# Altium PCB PCB1.PcbDoc (part 3 of 7)
Units mil, origin at the board's own origin, x right, y up, seen from the top; angles counter-clockwise.
Board outline 7650 x 4400 mil, 2 copper layers (Top Layer, Bottom Layer); 123 components, 190 nets, 788 pads, 165 vias.
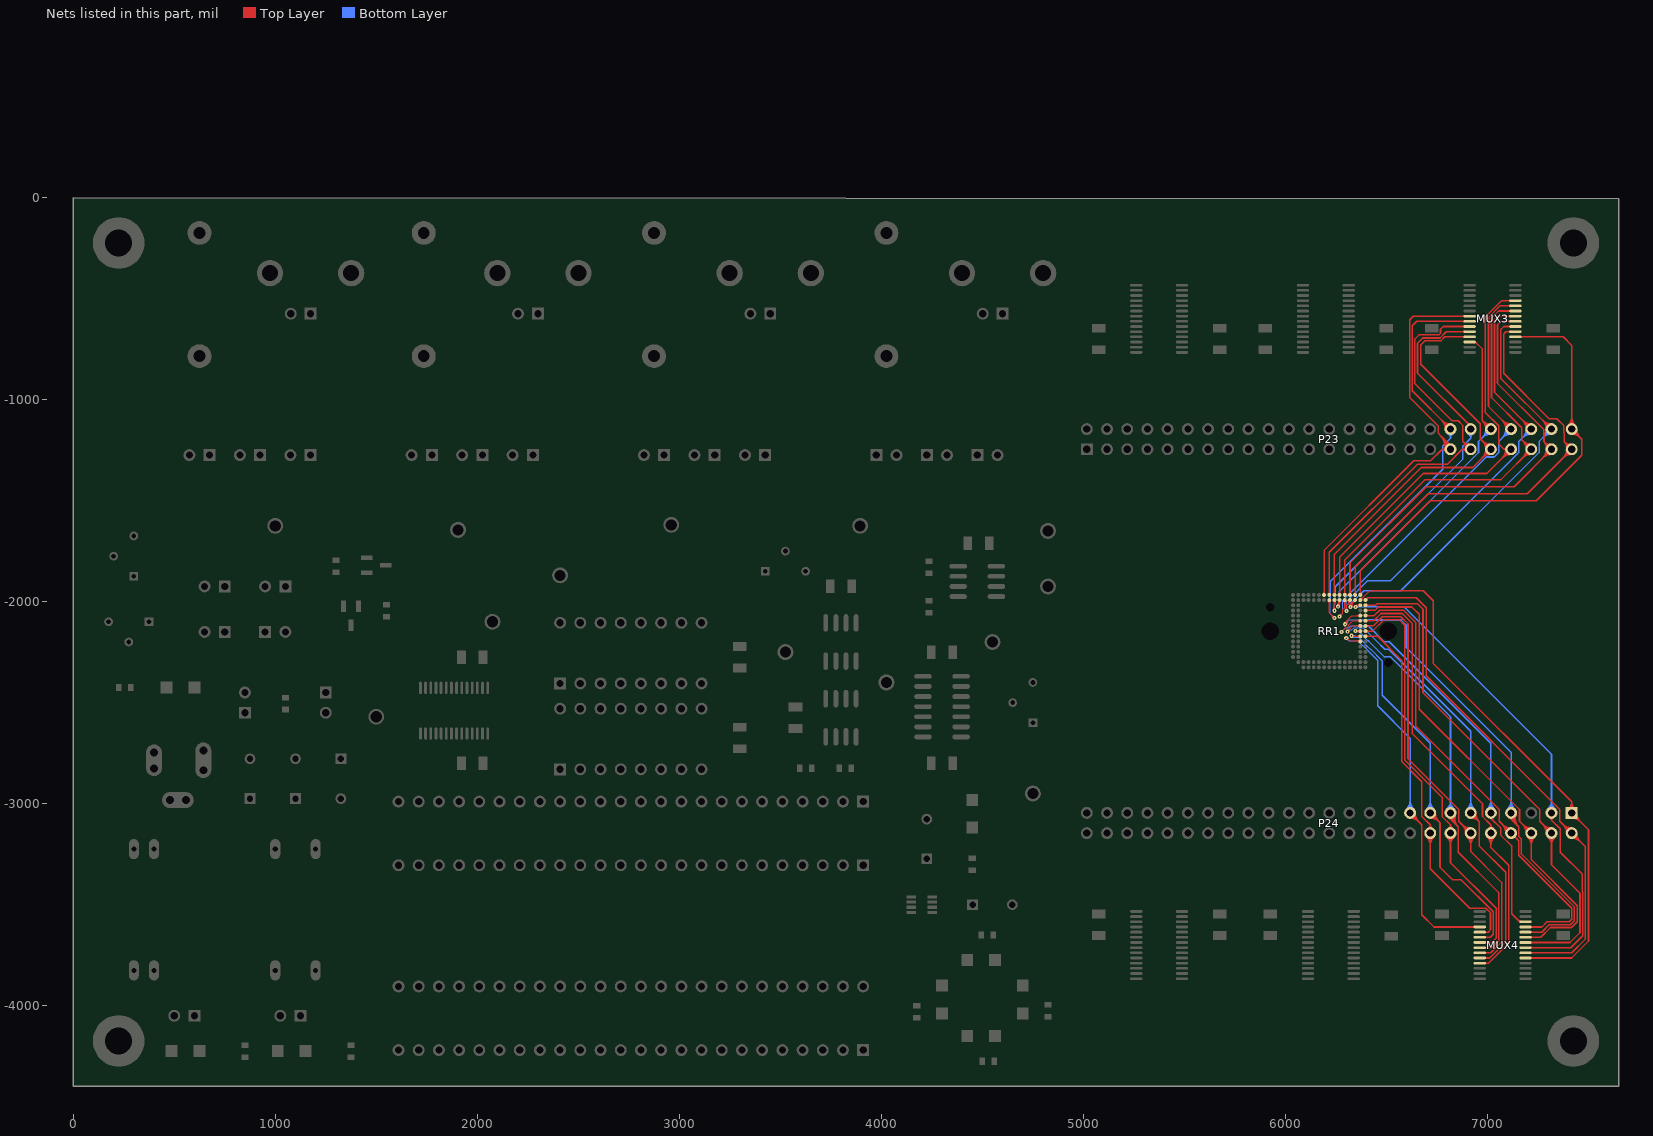
[diagram p3: the nets of this part, all layers, seen from the top]

## Via types
v1: diameter 30, hole 10, Top Layer to Bottom Layer, 118 vias
v2: diameter 20, hole 6, Top Layer to Bottom Layer, 47 vias

## Nets (pads, with @x,y where several pads share a name; then routed paths per layer and width w, separated by ;. In a path a pad name is that pad's centre, name@x,y a point inside that pad or via, vN(x,y) a via of type N, cw(c..) or ccw(c..) an arc to the next point about the centre after c; other vN are vias at no path point) (continued)
CELL34: MUX3.21 P23.37 RR1.37 | length 2430.9
  Top Layer w8: RR1.37@6187.28,-1962.73 ccw(c6177.3,-1952.76) 6191.41,-1952.76 ccw(c6205.51,-1952.76) RR1.37@6195.54,-1962.73 ; RR1.37@6191.41,-1966.87 6191.41,-1746.59 6634.47,-1303.53 6718.2,-1303.53 6775.73,-1246 ; 6759.99,-1169.99 cw(c6683.97,-1246) P23.37@6791.47,-1246 ; 6773.64,-1183.64 cw(c6711.29,-1246) P23.37@6799.47,-1246 ; 6787.3,-1197.3 cw(c6738.6,-1246) P23.37@6807.47,-1246 ; P23.37@6794.16,-1257.4 ccw(c6775.73,-1266.6) 6775.73,-1246 ; P23.37@6794.16,-1234.6 cw(c6775.73,-1225.4) 6775.73,-1246 ; 6800.96,-1210.96 cw(c6765.91,-1246) P23.37@6815.47,-1246 ; 6805.86,-1215.86 ccw(c6817,-1204.71) P23.37@6817,-1220.47 ; MUX3.21@6911.81,-587.2 6632.8,-587.2 6615,-605 6615,-989.51 6755.53,-1130.04 6755.53,-1165.53 6817,-1227 P23.37@6817,-1246 6775.73,-1246 ; 6881.21,-587.2 ccw(c6881.21,-580.23) 6886.15,-585.16 cw(c6881.21,-580.23) 6881.21,-587.2 ; 6881.21,-587.2 cw(c6881.21,-594.18) 6886.15,-589.25 ccw(c6881.21,-594.18) 6881.21,-587.2
CELL35: MUX3.22 P23.38 RR1.38 | length 2646
  Top Layer w5: RR1.38@6217,-1992.46 6217,-2056 v2(6242,-2081) ; 6233.02,-2075.46 ccw(c6243.72,-2072.59) v2@6241.5,-2083.45 ; 6236.46,-2072.02 cw(c6233.59,-2082.72) v2@6244.45,-2080.5 ; 6217,-2010.18 ccw(c6199.27,-2010.18) 6211.81,-1997.65 cw(c6199.27,-2010.18) 6217,-2010.18 ; 6217,-2010.18 cw(c6234.73,-2010.18) 6222.19,-1997.65 ccw(c6234.73,-2010.18) 6217,-2010.18 ; 6229.2,-2068.2 ccw(c6242,-2055.39) 6242,-2073.5 cw(c6242,-2055.39) 6229.2,-2068.2 ; 6229.2,-2068.2 cw(c6216.39,-2081) 6234.5,-2081 ccw(c6216.39,-2081) 6229.2,-2068.2
  Top Layer w8: P23.38@6791.47,-1146 ccw(c6729.84,-1146) 6773.42,-1102.42 ccw(c6817,-1058.84) P23.38@6817,-1120.47 ; P23.38@6799.47,-1146 ccw(c6757.16,-1146) 6787.08,-1116.08 ccw(c6817,-1086.16) P23.38@6817,-1128.47 ; P23.38@6817,-1146 6628,-957 6628,-635 6650.2,-612.8 MUX3.22@6911.81,-612.8 ; 6881.21,-612.8 ccw(c6881.21,-605.82) 6886.15,-610.75 cw(c6881.21,-605.82) 6881.21,-612.8 ; 6881.21,-612.8 cw(c6881.21,-619.77) 6886.15,-614.84 ccw(c6881.21,-619.77) 6881.21,-612.8
  Bottom Layer w5: 6222,-1996 6222,-2061 v2(6242,-2081) ; 6229.2,-2068.2 ccw(c6242,-2055.39) 6242,-2073.5 cw(c6242,-2055.39) 6229.2,-2068.2 ; 6229.2,-2068.2 cw(c6216.39,-2081) 6234.5,-2081 ccw(c6216.39,-2081) 6229.2,-2068.2
  Bottom Layer w8: 6222,-1996 6222,-1901 6778.47,-1344.53 6778.47,-1230.04 6817,-1191.51 ; P23.38@6803.69,-1167.78 cw(c6789.19,-1191.51) 6817,-1191.51 ; P23.38@6807.86,-1160.96 cw(c6797.91,-1177.25) 6817,-1177.25 cw(c6836.09,-1177.25) P23.38@6826.14,-1160.96 ; P23.38@6817,-1146 6817,-1191.51 ; P23.38@6830.31,-1167.78 ccw(c6844.81,-1191.51) 6817,-1191.51
CELL36: MUX3.23 P23.39 RR1.39 | length 2331.7
  Top Layer w8: RR1.39@6212.87,-1962.73 ccw(c6202.9,-1952.76) 6217,-1952.76 ccw(c6231.1,-1952.76) RR1.39@6221.13,-1962.73 ; RR1.39@6217,-1966.87 6217,-1756 6653.47,-1319.53 6802.2,-1319.53 6875.73,-1246 ; P23.39@6891.58,-1243.68 ccw(c6846.39,-1239.56) 6878.47,-1207.47 ; P23.39@6894.16,-1257.4 ccw(c6875.73,-1266.6) 6875.73,-1246 ; P23.39@6894.16,-1234.6 cw(c6875.73,-1225.4) 6875.73,-1246 ; P23.39@6899.54,-1244.41 ccw(c6868.52,-1241.58) 6890.55,-1219.55 ccw(c6912.58,-1197.52) P23.39@6915.41,-1228.54 ; MUX3.23@6911.81,-638.39 6781.61,-638.39 6767.46,-652.54 6767.46,-672.23 6759.7,-680 6661,-680 6641,-700 6641,-921 6825,-1105 6855,-1105 6878.47,-1128.47 6878.47,-1207.47 ; P23.39@6914.68,-1220.58 cw(c6910.56,-1175.39) 6878.47,-1207.47 ; 6875.73,-1246 P23.39@6917,-1246 6878.47,-1207.47 ; 6881.21,-638.39 ccw(c6881.21,-631.41) 6886.15,-636.34 cw(c6881.21,-631.41) 6881.21,-638.39 ; 6881.21,-638.39 cw(c6881.21,-645.36) 6886.15,-640.43 ccw(c6881.21,-645.36) 6881.21,-638.39
CELL37: MUX3.24 P23.40 RR1.40 | length 2334.2
  Top Layer w5: v2(6242.5,-2045.32) 6242.5,-1992.55 RR1.40@6242.59,-1992.46 ; 6242.5,-2027.21 ccw(c6260.61,-2027.21) 6247.8,-2040.02 cw(c6260.61,-2027.21) 6242.5,-2027.21 ; 6242.5,-2027.21 cw(c6224.39,-2027.21) 6237.2,-2040.02 ccw(c6224.39,-2027.21) 6242.5,-2027.21 ; RR1.40@6237.4,-1997.65 cw(c6225.08,-2009.96) 6242.5,-2009.96 ccw(c6225.08,-2009.96) RR1.40@6237.4,-1997.65 ; 6242.5,-2010.4 cw(c6260.54,-2010.4) 6247.78,-1997.65 ccw(c6260.54,-2010.4) 6242.5,-2010.4
  Top Layer w8: MUX3.24@6911.81,-663.98 6796.02,-663.98 6765,-695 6680,-695 6654,-721 6654,-869 6917,-1132 P23.40@6917,-1146 ; 6881.21,-663.98 ccw(c6881.21,-657) 6886.15,-661.93 cw(c6881.21,-657) 6881.21,-663.98 ; 6881.21,-663.98 cw(c6881.21,-670.95) 6886.15,-666.02 ccw(c6881.21,-670.95) 6881.21,-663.98
  Bottom Layer w5: v2(6242.5,-2045.32) 6242.5,-2017.75 6247,-2013.25 6247,-1960 ; 6242.5,-2027.21 ccw(c6260.61,-2027.21) 6247.8,-2040.02 cw(c6260.61,-2027.21) 6242.5,-2027.21 ; 6242.5,-2027.21 cw(c6224.39,-2027.21) 6237.2,-2040.02 ccw(c6224.39,-2027.21) 6242.5,-2027.21
  Bottom Layer w8: 6247,-1960 6247,-1926 6878.47,-1294.53 6878.47,-1230.04 6917,-1191.51 ; P23.40@6903.69,-1167.78 cw(c6889.19,-1191.51) 6917,-1191.51 ; P23.40@6907.86,-1160.96 cw(c6897.91,-1177.25) 6917,-1177.25 cw(c6936.09,-1177.25) P23.40@6926.14,-1160.96 ; P23.40@6917,-1146 6917,-1191.51 ; P23.40@6930.31,-1167.78 ccw(c6944.81,-1191.51) 6917,-1191.51
CELL38: MUX3.25 P23.41 RR1.41 | length 2479.9
  Top Layer w8: RR1.41@6238.46,-1962.73 ccw(c6228.49,-1952.76) 6242.59,-1952.76 ccw(c6256.7,-1952.76) RR1.41@6246.72,-1962.73 ; RR1.41@6242.59,-1966.87 6242.59,-1765.41 6672,-1336 6927,-1336 P23.41@7017,-1246 6965,-1194 6965,-1120 6670,-825 6670,-730 6692,-708 6770.38,-708 6788.82,-689.57 MUX3.25@6911.81,-689.57 ; P23.41@7017,-1271.53 ccw(c7017,-1333.16) 6973.42,-1289.58 ccw(c6929.84,-1246) 6991.47,-1246 ccw(c6929.84,-1246) 6973.42,-1202.42 ccw(c7017,-1158.84) P23.41@7017,-1220.47 ; P23.41@7017,-1263.53 ccw(c7017,-1305.84) 6987.08,-1275.92 ccw(c6957.16,-1246) 6999.47,-1246 ccw(c6957.16,-1246) 6987.08,-1216.08 ccw(c7017,-1186.16) P23.41@7017,-1228.47 ; 6881.21,-689.57 ccw(c6881.21,-682.59) 6886.15,-687.52 cw(c6881.21,-682.59) 6881.21,-689.57 ; 6881.21,-689.57 cw(c6881.21,-696.54) 6886.15,-691.61 ccw(c6881.21,-696.54) 6881.21,-689.57
CELL39: MUX3.26 P23.42 RR1.42 | length 2556.9
  Top Layer w5: v2@6258.89,-2017.58 ccw(c6257.42,-2007.83) 6265.35,-2013.69 ; v2(6260,-2025) 6268.18,-2016.82 ; 6260.99,-2011.46 ccw(c6268.34,-2016.89) v2@6261.79,-2023.26 ; RR1.42@6261.83,-1996.15 cw(c6246.66,-2004.97) 6263.61,-2009.51 cw(c6280.57,-2014.05) RR1.42@6271.83,-1998.83 ; 6264.49,-2006.73 ccw(c6272.62,-2012.73) v2@6265.38,-2019.77 ; 6265.95,-2012.88 ccw(c6271.06,-2016.66) v2@6265.99,-2020.48 ; 6268.18,-2016.82 ccw(c6271.84,-2020.48) 6267.01,-2022.32 cw(c6271.84,-2020.48) 6268.18,-2016.82 ; 6268.18,-2016.82 cw(c6264.52,-2013.16) 6262.68,-2017.99 ccw(c6264.52,-2013.16) 6268.18,-2016.82 ; 6268.18,-2016.82 RR1.42@6268.18,-1992.46 ; 6268.18,-2010.18 ccw(c6250.45,-2010.18) 6262.99,-1997.65 cw(c6250.45,-2010.18) 6268.18,-2010.18 ; 6268.18,-2010.18 cw(c6285.91,-2010.18) 6273.37,-1997.65 ccw(c6285.91,-2010.18) 6268.18,-2010.18 ; RR1.42@6268.18,-1992.46 cw(c6234.08,-1992.46) 6255.33,-2019.13 ccw(c6234.08,-1992.46) RR1.42@6268.18,-1992.46 ; v2@6258.44,-2023.04 ccw(c6242.34,-2002.83) 6268.18,-2002.83 cw(c6242.34,-2002.83) v2@6258.44,-2023.04 ; v2@6261.56,-2026.96 ccw(c6250.61,-2013.21) 6268.18,-2013.21 cw(c6250.61,-2013.21) v2@6261.56,-2026.96
  Top Layer w8: MUX3.26@6911.81,-715.16 6940.16,-715.16 6975,-750 6975,-1104 ; MUX3.26@6937.94,-713.71 ccw(c6952.23,-705.46) 6947.96,-721.4 ; P23.42@6991.48,-1145.32 ccw(c6935.17,-1143.83) 6975,-1104 ; P23.42@6999.48,-1145.54 ccw(c6960.81,-1144.51) 6988.16,-1117.16 ccw(c7015.51,-1089.81) P23.42@7016.54,-1128.48 ; P23.42@7016.32,-1120.48 cw(c7014.83,-1064.17) 6975,-1104 ; P23.42@7017,-1146 6975,-1104 ; MUX3.26@6935.43,-718.05 cw(c6935.43,-736.43) 6948.43,-723.43 ccw(c6935.43,-736.43) MUX3.26@6935.43,-718.05
  Bottom Layer w5: v2@6258.06,-2017.76 ccw(c6255.51,-2008.23) 6264.05,-2013.16 ; v2(6260,-2025) 6267,-2018 6267,-1977 ; 6260.1,-2010.47 ccw(c6269.16,-2015.78) v2@6261.76,-2023.23 ; 6263.37,-2004.91 ccw(c6273.85,-2011.06) v2@6265.29,-2019.68 ; 6265.28,-2011.02 ccw(c6272.58,-2015.23) v2@6265.92,-2020.4 ; v2@6254.7,-2019.7 ccw(c6224.99,-1989.99) 6267,-1989.99 cw(c6224.99,-1989.99) v2@6254.7,-2019.7 ; v2@6258.23,-2023.23 ccw(c6237.07,-2002.07) 6267,-2002.07 cw(c6237.07,-2002.07) v2@6258.23,-2023.23 ; v2@6261.77,-2026.77 ccw(c6249.14,-2014.14) 6267,-2014.14 cw(c6249.14,-2014.14) v2@6261.77,-2026.77
  Bottom Layer w8: 6267,-1977 6267,-1950.49 6955.53,-1261.96 6955.53,-1207.47 P23.42@7017,-1146 ; P23.42@6991.47,-1146 cw(c6929.84,-1146) 6973.42,-1189.58 cw(c7017,-1233.16) P23.42@7017,-1171.53 ; P23.42@6999.47,-1146 cw(c6957.16,-1146) 6987.08,-1175.92 cw(c7017,-1205.84) P23.42@7017,-1163.53
CELL40: MUX3.11 P23.43 RR1.43 | length 2402.7
  Top Layer w8: RR1.43@6264.05,-1962.73 ccw(c6254.08,-1952.76) 6268.18,-1952.76 ccw(c6282.29,-1952.76) RR1.43@6272.31,-1962.73 ; RR1.43@6268.18,-1966.87 6268.18,-1779.82 6682,-1366 6997,-1366 P23.43@7117,-1246 7082.06,-1246 ; P23.43@7091.47,-1246 cw(c7029.84,-1246) 7073.42,-1289.58 cw(c7117,-1333.16) P23.43@7117,-1271.53 ; P23.43@7092.68,-1253.76 ccw(c7082.06,-1257.15) 7082.06,-1246 ; P23.43@7092.68,-1238.24 cw(c7082.06,-1234.85) 7082.06,-1246 ; P23.43@7099.47,-1246 cw(c7057.16,-1246) 7087.08,-1275.92 cw(c7117,-1305.84) P23.43@7117,-1263.53 ; MUX3.11@7138.19,-510.43 7069.57,-510.43 6990,-590 6990,-1064.51 7055.53,-1130.04 7055.53,-1219.47 7082.06,-1246 ; 7107.59,-510.43 ccw(c7107.59,-503.46) 7112.52,-508.39 cw(c7107.59,-503.46) 7107.59,-510.43 ; 7107.59,-510.43 cw(c7107.59,-517.41) 7112.52,-512.48 ccw(c7107.59,-517.41) 7107.59,-510.43
CELL41: MUX3.10 P23.44 RR1.44 | length 2665
  Top Layer w5: v2@6265.55,-2073.5 cw(c6276.41,-2075.72) 6273.54,-2065.02 ; v2(6268,-2074) 6284.5,-2057.5 6284.5,-2038.75 6293.77,-2029.48 RR1.44@6293.77,-1992.46 ; v2@6268.5,-2076.45 ccw(c6266.28,-2065.59) 6276.98,-2068.46 ; 6280.8,-2061.2 ccw(c6293.61,-2074) 6275.5,-2074 cw(c6293.61,-2074) 6280.8,-2061.2 ; 6280.8,-2061.2 cw(c6268,-2048.39) 6268,-2066.5 ccw(c6268,-2048.39) 6280.8,-2061.2 ; 6293.77,-2010.18 ccw(c6276.05,-2010.18) 6288.58,-1997.65 cw(c6276.05,-2010.18) 6293.77,-2010.18 ; 6293.77,-2010.18 cw(c6311.5,-2010.18) 6298.96,-1997.65 ccw(c6311.5,-2010.18) 6293.77,-2010.18
  Top Layer w8: P23.44@7091.47,-1146 ccw(c7029.84,-1146) 7073.42,-1102.42 ccw(c7117,-1058.84) P23.44@7117,-1120.47 ; P23.44@7099.47,-1146 ccw(c7057.16,-1146) 7087.08,-1116.08 ccw(c7117,-1086.16) P23.44@7117,-1128.47 ; P23.44@7117,-1146 7005,-1034 7005,-593.38 7062.36,-536.02 MUX3.10@7138.19,-536.02 ; 7107.59,-536.02 ccw(c7107.59,-529.05) 7112.52,-533.98 cw(c7107.59,-529.05) 7107.59,-536.02 ; 7107.59,-536.02 cw(c7107.59,-543) 7112.52,-538.07 ccw(c7107.59,-543) 7107.59,-536.02
  Bottom Layer w5: v2(6268,-2074) 6284,-2058 6284,-1994 6327,-1951 ; v2@6268,-2066.5 ccw(c6268,-2048.39) 6280.8,-2061.2 ccw(c6293.61,-2074) v2@6275.5,-2074
  Bottom Layer w8: 6327,-1951 6993.47,-1284.53 7032.96,-1284.53 7055.53,-1261.96 7055.53,-1207.47 P23.44@7117,-1146 ; P23.44@7091.47,-1146 cw(c7029.84,-1146) 7073.42,-1189.58 cw(c7117,-1233.16) P23.44@7117,-1171.53 ; P23.44@7099.47,-1146 cw(c7057.16,-1146) 7087.08,-1175.92 cw(c7117,-1205.84) P23.44@7117,-1163.53
CELL42: MUX3.9 P23.45 RR1.45 | length 2557.2
  Top Layer w8: RR1.45@6289.64,-1962.73 ccw(c6279.67,-1952.76) 6293.77,-1952.76 ccw(c6307.88,-1952.76) RR1.45@6297.9,-1962.73 ; RR1.45@6293.77,-1966.87 6293.77,-1794.23 6692,-1396 7067,-1396 P23.45@7217,-1246 7170,-1199 7170,-1140 7020,-990 7020,-596.77 7055.16,-561.61 MUX3.9@7138.19,-561.61 ; P23.45@7217,-1271.53 ccw(c7217,-1333.16) 7173.42,-1289.58 ccw(c7129.84,-1246) 7191.47,-1246 ccw(c7129.84,-1246) 7173.42,-1202.42 ccw(c7217,-1158.84) P23.45@7217,-1220.47 ; P23.45@7217,-1263.53 ccw(c7217,-1305.84) 7187.08,-1275.92 ccw(c7157.16,-1246) 7199.47,-1246 ccw(c7157.16,-1246) 7187.08,-1216.08 ccw(c7217,-1186.16) P23.45@7217,-1228.47 ; 7107.59,-561.61 ccw(c7107.59,-554.64) 7112.52,-559.57 cw(c7107.59,-554.64) 7107.59,-561.61 ; 7107.59,-561.61 cw(c7107.59,-568.59) 7112.52,-563.66 ccw(c7107.59,-568.59) 7107.59,-561.61
CELL43: MUX3.8 P23.46 RR1.46 | length 2720.6
  Top Layer w5: v2(6302,-2046) 6304.5,-2043.5 6304.5,-2018.75 ; 6311.51,-2002.62 cw(c6329.27,-2003.91) RR1.46@6317.62,-1990.45 ; RR1.46@6313.81,-1997.26 cw(c6306.24,-2003.8) 6316.22,-2004.52 ; 6316.3,-2003.38 cw(c6329.65,-2004.35) RR1.46@6320.89,-1994.23 ; RR1.46@6319.36,-1992.46 6319.36,-2003.89 ; 6304.5,-2018.75 ccw(c6284.83,-1999.08) 6312.15,-1993.84 cw(c6284.83,-1999.08) 6304.5,-2018.75 ; 6304.5,-2018.75 6319.36,-2003.89 ; 6319.36,-2003.89 ccw(c6314.13,-2003.89) 6316.31,-1999.13 cw(c6314.13,-2003.89) 6319.36,-2003.89 ; 6319.36,-2003.89 cw(c6324.59,-2003.89) 6322.42,-1999.13 ccw(c6324.59,-2003.89) 6319.36,-2003.89 ; 6311.17,-2012.08 ccw(c6296.02,-1996.93) 6317.06,-1992.9 cw(c6296.02,-1996.93) 6311.17,-2012.08 ; 6317.84,-2005.41 ccw(c6307.22,-1994.79) 6321.97,-1991.96 cw(c6307.22,-1994.79) 6317.84,-2005.41
  Top Layer w8: MUX3.8@7138.19,-587.2 7052.8,-587.2 7035,-605 7035,-964 P23.46@7217,-1146 ; P23.46@7191.47,-1146 ccw(c7129.84,-1146) 7173.42,-1102.42 ccw(c7217,-1058.84) P23.46@7217,-1120.47 ; P23.46@7199.47,-1146 ccw(c7157.16,-1146) 7187.08,-1116.08 ccw(c7217,-1086.16) P23.46@7217,-1128.47 ; 7107.59,-587.2 ccw(c7107.59,-580.23) 7112.52,-585.16 cw(c7107.59,-580.23) 7107.59,-587.2 ; 7107.59,-587.2 cw(c7107.59,-594.18) 7112.52,-589.25 ccw(c7107.59,-594.18) 7107.59,-587.2
  Bottom Layer w5: v2(6302,-2046) 6302,-2001 6362,-1941 ; 6302,-2027.89 ccw(c6320.11,-2027.89) 6307.3,-2040.7 cw(c6320.11,-2027.89) 6302,-2027.89 ; 6302,-2027.89 cw(c6283.89,-2027.89) 6296.7,-2040.7 ccw(c6283.89,-2027.89) 6302,-2027.89
  Bottom Layer w8: 6362,-1941 6407,-1896 6521.49,-1896 7155.53,-1261.96 7155.53,-1207.47 P23.46@7217,-1146 ; P23.46@7191.47,-1146 cw(c7129.84,-1146) 7173.42,-1189.58 cw(c7217,-1233.16) P23.46@7217,-1171.53 ; P23.46@7199.47,-1146 cw(c7157.16,-1146) 7187.08,-1175.92 cw(c7217,-1205.84) P23.46@7217,-1163.53
CELL44: MUX3.7 P23.47 RR1.47 | length 2543.3
  Top Layer w8: RR1.47@6315.23,-1962.73 ccw(c6305.26,-1952.76) 6319.36,-1952.76 ccw(c6333.47,-1952.76) RR1.47@6323.49,-1962.73 ; RR1.47@6319.36,-1966.87 6319.36,-1808.64 6697,-1431 7132,-1431 P23.47@7317,-1246 7280,-1209 ; MUX3.7@7138.19,-612.8 7067.2,-612.8 7050,-630 7050,-920 7278.47,-1148.47 7278.47,-1163.49 7280,-1165.01 7280,-1209 ; P23.47@7291.47,-1246 cw(c7229.84,-1246) 7273.42,-1289.58 cw(c7317,-1333.16) P23.47@7317,-1271.53 ; P23.47@7291.66,-1242.88 ccw(c7251.11,-1237.89) 7280,-1209 ; P23.47@7299.47,-1246 cw(c7257.16,-1246) 7287.08,-1275.92 cw(c7317,-1305.84) P23.47@7317,-1263.53 ; P23.47@7299.6,-1243.86 ccw(c7271.76,-1240.43) 7291.6,-1220.6 ccw(c7311.43,-1200.76) P23.47@7314.86,-1228.6 ; P23.47@7313.88,-1220.66 cw(c7308.89,-1180.11) 7280,-1209 ; 7107.59,-612.8 ccw(c7107.59,-605.82) 7112.52,-610.75 cw(c7107.59,-605.82) 7107.59,-612.8 ; 7107.59,-612.8 cw(c7107.59,-619.77) 7112.52,-614.84 ccw(c7107.59,-619.77) 7107.59,-612.8
CELL45: MUX3.6 P23.48 RR1.48 | length 2800.9
  Top Layer w5: v2@6320.95,-2023.73 ccw(c6316.25,-2013.59) 6327.05,-2016.48 ; v2(6322,-2026) 6322,-2015.41 ; 6327.51,-2014.77 ccw(c6337.04,-2017.32) v2@6328.5,-2022.25 ; 6334.07,-2009.36 cw(c6352.3,-2019.88) RR1.48@6346.85,-1999.55 ; 6336.24,-1997.55 cw(c6346.56,-2000.32) RR1.48@6344.42,-1989.85 ; 6336.42,-2005.28 ccw(c6323.95,-1998.08) RR1.48@6337.86,-1994.36 ; 6339.86,-2001.16 ccw(c6337.09,-1990.85) RR1.48@6347.56,-1992.99 ; RR1.48@6344.95,-1992.46 6322,-2015.41 ; 6322,-2015.41 ccw(c6325.73,-2015.41) 6324.49,-2018.93 cw(c6325.73,-2015.41) 6322,-2015.41 ; 6322,-2015.41 cw(c6318.27,-2015.41) 6319.51,-2018.93 ccw(c6318.27,-2015.41) 6322,-2015.41 ; 6332.42,-2004.99 ccw(c6319.88,-1992.46) 6337.61,-1992.46 cw(c6319.88,-1992.46) 6332.42,-2004.99 ; 6332.42,-2004.99 cw(c6344.95,-2017.53) 6344.95,-1999.8 ccw(c6344.95,-2017.53) 6332.42,-2004.99 ; v2@6319.5,-2026 cw(c6339.03,-2026) 6325.22,-2012.19 ccw(c6339.03,-2026) v2@6319.5,-2026 ; v2@6324.5,-2026 cw(c6356.1,-2026) 6333.76,-2003.65 ccw(c6356.1,-2026) v2@6324.5,-2026 ; v2@6329.5,-2026 cw(c6373.17,-2026) 6342.29,-1995.12 ccw(c6373.17,-2026) v2@6329.5,-2026
  Top Layer w8: MUX3.6@7138.19,-638.39 7081.61,-638.39 7065,-655 7065,-894 P23.48@7317,-1146 ; P23.48@7291.47,-1146 ccw(c7229.84,-1146) 7273.42,-1102.42 ccw(c7317,-1058.84) P23.48@7317,-1120.47 ; P23.48@7299.47,-1146 ccw(c7257.16,-1146) 7287.08,-1116.08 ccw(c7317,-1086.16) P23.48@7317,-1128.47 ; 7107.59,-638.39 ccw(c7107.59,-631.41) 7112.52,-636.34 cw(c7107.59,-631.41) 7107.59,-638.39 ; 7107.59,-638.39 cw(c7107.59,-645.36) 7112.52,-640.43 ccw(c7107.59,-645.36) 7107.59,-638.39
  Bottom Layer w5: v2(6322,-2026) 6322,-2011 ; 6365,-1968 6322,-2011 ; 6322,-2011 ccw(c6333.25,-2011) 6326.5,-2020 cw(c6333.25,-2011) 6322,-2011 ; 6322,-2011 cw(c6310.75,-2011) 6317.5,-2020 ccw(c6310.75,-2011) 6322,-2011
  Bottom Layer w8: 6365,-1968 6387,-1946 6571.49,-1946 7255.53,-1261.96 7255.53,-1207.47 P23.48@7317,-1146 ; P23.48@7291.47,-1146 cw(c7229.84,-1146) 7273.42,-1189.58 cw(c7317,-1233.16) P23.48@7317,-1171.53 ; P23.48@7299.47,-1146 cw(c7257.16,-1146) 7287.08,-1175.92 cw(c7317,-1205.84) P23.48@7317,-1163.53
CELL46: MUX3.5 P23.49 RR1.49 | length 2580.3
  Top Layer w8: RR1.49@6340.82,-1962.73 ccw(c6330.85,-1952.76) 6344.95,-1952.76 ccw(c6359.06,-1952.76) RR1.49@6349.08,-1962.73 ; RR1.49@6344.95,-1966.87 6344.95,-1828.05 6707,-1466 7197,-1466 P23.49@7417,-1246 7380,-1209 ; MUX3.5@7138.19,-663.98 7091.02,-663.98 7080,-675 7080,-870 7305,-1095 7343.43,-1095 7378.47,-1130.04 7378.47,-1163.49 7380,-1165.01 7380,-1209 ; P23.49@7391.47,-1246 cw(c7329.84,-1246) 7373.42,-1289.58 cw(c7417,-1333.16) P23.49@7417,-1271.53 ; P23.49@7391.66,-1242.88 ccw(c7351.11,-1237.89) 7380,-1209 ; P23.49@7399.47,-1246 cw(c7357.16,-1246) 7387.08,-1275.92 cw(c7417,-1305.84) P23.49@7417,-1263.53 ; P23.49@7399.6,-1243.86 ccw(c7371.76,-1240.43) 7391.6,-1220.6 ccw(c7411.43,-1200.76) P23.49@7414.86,-1228.6 ; P23.49@7413.88,-1220.66 cw(c7408.89,-1180.11) 7380,-1209 ; 7107.59,-663.98 ccw(c7107.59,-657) 7112.52,-661.93 cw(c7107.59,-657) 7107.59,-663.98 ; 7107.59,-663.98 cw(c7107.59,-670.95) 7112.52,-666.02 ccw(c7107.59,-670.95) 7107.59,-663.98
CELL47: MUX3.4 P23.50 RR1.50 | length 2684.3
  Top Layer w8: RR1.50@6366.41,-1962.73 ccw(c6356.44,-1952.76) 6370.54,-1952.76 ccw(c6384.65,-1952.76) RR1.50@6374.67,-1962.73 ; RR1.50@6370.54,-1966.87 6370.54,-1847.46 6717,-1501 7242,-1501 7467,-1276 7467,-1196 P23.50@7417,-1146 7417,-732 7374.57,-689.57 MUX3.4@7138.19,-689.57 ; P23.50@7398.95,-1127.95 ccw(c7355.37,-1084.37) 7417,-1084.37 ccw(c7478.63,-1084.37) P23.50@7435.05,-1127.95 ; P23.50@7404.61,-1133.61 ccw(c7374.68,-1103.68) 7417,-1103.68 ccw(c7459.32,-1103.68) P23.50@7429.39,-1133.61 ; P23.50@7417,-1171.53 cw(c7417,-1233.16) 7460.58,-1189.58 cw(c7504.16,-1146) P23.50@7442.53,-1146 ; P23.50@7417,-1163.53 cw(c7417,-1205.84) 7446.92,-1175.92 cw(c7476.84,-1146) P23.50@7434.53,-1146 ; 7168.79,-689.57 ccw(c7168.79,-696.54) 7163.85,-691.61 cw(c7168.79,-696.54) 7168.79,-689.57 ; 7168.79,-689.57 cw(c7168.79,-682.59) 7163.85,-687.52 ccw(c7168.79,-682.59) 7168.79,-689.57
CELL48: MUX4.19 P24.1 RR1.51 | length 3150.9
  Top Layer w5: RR1.51@6367.94,-1991.92 cw(c6378.4,-1994.07) 6375.64,-1983.75 ; RR1.51@6370.54,-1992.46 6417,-1946 6432,-1946 ; RR1.51@6371.08,-1995.06 ccw(c6368.93,-1984.6) 6379.25,-1987.36 ; 6383.08,-1979.92 ccw(c6395.61,-1992.46) 6377.89,-1992.46 cw(c6395.61,-1992.46) 6383.08,-1979.92 ; 6383.08,-1979.92 cw(c6370.54,-1967.39) 6370.54,-1985.11 ccw(c6370.54,-1967.39) 6383.08,-1979.92
  Top Layer w8: 6432,-1946 6682,-1946 6732,-1996 6732,-2306 7417,-2991 ; MUX4.19@7188.19,-3763.98 7416.02,-3763.98 7500,-3680 7500,-3129 P24.1@7417,-3046 7417,-2991 ; P24.1@7400.52,-3026.5 ccw(c7370.52,-2991) 7417,-2991 ; P24.1@7405.69,-3032.61 ccw(c7385.09,-3008.24) 7417,-3008.24 ccw(c7448.91,-3008.24) P24.1@7428.31,-3032.61 ; P24.1@7417,-3071.53 cw(c7417,-3133.16) 7460.58,-3089.58 cw(c7504.16,-3046) P24.1@7442.53,-3046 ; P24.1@7417,-3063.53 cw(c7417,-3105.84) 7446.92,-3075.92 cw(c7476.84,-3046) P24.1@7434.53,-3046 ; P24.1@7433.48,-3026.5 cw(c7463.48,-2991) 7417,-2991 ; 7218.79,-3763.98 ccw(c7218.79,-3770.95) 7213.85,-3766.02 cw(c7218.79,-3770.95) 7218.79,-3763.98 ; 7218.79,-3763.98 cw(c7218.79,-3757) 7213.85,-3761.93 ccw(c7218.79,-3757) 7218.79,-3763.98
CELL49: MUX4.20 P24.2 RR1.52 | length 3096.8
  Top Layer w8: RR1.52@6396.13,-1992.46 6407.59,-1981 6647,-1981 6697,-2031 6697,-2367.27 7358.53,-3028.8 7358.53,-3087.53 P24.2@7417,-3146 7485,-3214 7485,-3670 7416.61,-3738.39 MUX4.20@7188.19,-3738.39 ; RR1.52@6396.21,-1986.61 ccw(c6396.4,-1973.15) 6405.98,-1982.61 ccw(c6415.44,-1992.19) RR1.52@6401.98,-1992.38 ; P24.2@7391.47,-3146 ccw(c7329.84,-3146) 7373.42,-3102.42 ccw(c7417,-3058.84) P24.2@7417,-3120.47 ; P24.2@7399.47,-3146 ccw(c7357.16,-3146) 7387.08,-3116.08 ccw(c7417,-3086.16) P24.2@7417,-3128.47 ; P24.2@7417,-3171.53 cw(c7417,-3233.16) 7460.58,-3189.58 cw(c7504.16,-3146) P24.2@7442.53,-3146 ; P24.2@7417,-3163.53 cw(c7417,-3205.84) 7446.92,-3175.92 cw(c7476.84,-3146) P24.2@7434.53,-3146 ; RR1.52@6396.13,-1986.61 ccw(c6396.13,-1972.51) 6406.11,-1982.48 ; RR1.52@6396.13,-1986.61 ccw(c6396.13,-1972.51) 6406.11,-1982.48 ; RR1.52@6396.16,-1986.61 ccw(c6396.22,-1972.71) 6406.11,-1982.48 ; RR1.52@6396.17,-1986.61 ccw(c6396.25,-1972.8) 6405.96,-1982.63 ; RR1.52@6396.17,-1986.61 ccw(c6396.25,-1972.8) 6405.96,-1982.63 ; RR1.52@6401.98,-1992.46 cw(c6416.08,-1992.46) 6406.11,-1982.48 ; RR1.52@6401.98,-1992.46 cw(c6416.08,-1992.46) 6406.11,-1982.48 ; RR1.52@6401.98,-1992.43 cw(c6415.88,-1992.37) 6406.11,-1982.48 ; RR1.52@6401.98,-1992.42 cw(c6415.79,-1992.34) 6405.96,-1982.63 ; RR1.52@6401.98,-1992.42 cw(c6415.79,-1992.34) 6405.96,-1982.63 ; 7218.79,-3738.39 ccw(c7218.79,-3745.36) 7213.85,-3740.43 cw(c7218.79,-3745.36) 7218.79,-3738.39 ; 7218.79,-3738.39 cw(c7218.79,-3731.41) 7213.85,-3736.34 ccw(c7218.79,-3731.41) 7218.79,-3738.39
CELL50: MUX4.21 P24.3 RR1.53 | length 3093.6
  Top Layer w5: v2(6347,-2026) 6354.95,-2018.05 ; v2@6351.12,-2019.73 ccw(c6352.79,-2017.19) 6355.22,-2019.01 ccw(c6359.97,-2022.55) v2@6354.25,-2024.07 ; RR1.53@6363.91,-2014.89 cw(c6356.74,-2011.48) 6358.8,-2019.15 cw(c6359.98,-2023.58) RR1.53@6364.04,-2021.45 ; v2@6349.32,-2026.92 cw(c6365.75,-2033.46) RR1.53@6361.18,-2016.38 ; v2@6349.32,-2026.92 cw(c6365.75,-2033.46) RR1.53@6361.18,-2016.38 ; v2@6349.32,-2026.92 cw(c6365.75,-2033.46) RR1.53@6361.18,-2016.38 ; v2@6349.48,-2026.31 cw(c6359.91,-2027.6) 6357.19,-2017.45 ; v2@6349.48,-2026.31 cw(c6359.91,-2027.6) 6357.19,-2017.45 ; v2@6349.48,-2026.31 cw(c6359.91,-2027.6) 6357.19,-2017.45 ; 6354.95,-2018.05 ccw(c6354.95,-2005.17) 6364.88,-2013.37 cw(c6354.95,-2005.17) 6354.95,-2018.05 ; 6354.95,-2018.05 cw(c6354.95,-2030.93) 6364.88,-2022.72 ccw(c6354.95,-2030.93) 6354.95,-2018.05 ; 6354.95,-2018.05 ccw(c6358.26,-2021.36) 6353.93,-2023.14 cw(c6358.26,-2021.36) 6354.95,-2018.05 ; 6354.95,-2018.05 cw(c6351.64,-2014.74) 6349.86,-2019.07 ccw(c6351.64,-2014.74) 6354.95,-2018.05 ; 6354.95,-2018.05 RR1.53@6370.54,-2018.05 ; RR1.53@6370.54,-2018.05 ccw(c6370.54,-2036.21) 6353.88,-2028.98 cw(c6370.54,-2036.21) RR1.53@6370.54,-2018.05 ; v2@6344.71,-2025.01 cw(c6355.31,-2029.6) 6355.31,-2018.05 ccw(c6355.31,-2029.6) v2@6344.71,-2025.01 ; v2@6349.29,-2026.99 cw(c6362.92,-2032.9) 6362.92,-2018.05 ccw(c6362.92,-2032.9) v2@6349.29,-2026.99
  Top Layer w8: MUX4.21@7188.19,-3712.8 7412.2,-3712.8 7471,-3654 7471,-3436.62 7470,-3435.62 7470,-3350 7360,-3240 7360,-3125 7317,-3082 ; P24.3@7308.56,-3070.09 cw(c7304.38,-3082) 7317,-3082 ; P24.3@7317,-3046 7317,-3082 ; P24.3@7325.44,-3070.09 ccw(c7329.62,-3082) 7317,-3082 ; 7218.79,-3712.8 ccw(c7218.79,-3719.77) 7213.85,-3714.84 cw(c7218.79,-3719.77) 7218.79,-3712.8 ; 7218.79,-3712.8 cw(c7218.79,-3705.82) 7213.85,-3710.75 ccw(c7218.79,-3705.82) 7218.79,-3712.8
  Bottom Layer w5: v2(6347,-2026) 6397,-2026 ; v2@6352.3,-2031.3 cw(c6365.11,-2044.11) 6365.11,-2026 cw(c6365.11,-2007.89) v2@6352.3,-2020.7
  Bottom Layer w8: 6397,-2026 6587,-2026 7317,-2756 P24.3@7317,-3046 ; P24.3@7298.95,-3027.95 ccw(c7255.37,-2984.37) 7317,-2984.37 ccw(c7378.63,-2984.37) P24.3@7335.05,-3027.95 ; P24.3@7304.61,-3033.61 ccw(c7274.68,-3003.68) 7317,-3003.68 ccw(c7359.32,-3003.68) P24.3@7329.39,-3033.61
CELL51: MUX4.22 P24.4 RR1.54 | length 2882.1
  Top Layer w8: RR1.54@6396.13,-2018.05 6445.92,-2018.05 6453.28,-2010.69 6654.07,-2010.69 6680.73,-2037.36 6680.73,-2451 7258.53,-3028.8 7258.53,-3087.53 P24.4@7317,-3146 7317,-3302 7458,-3443 7458,-3638 7408.79,-3687.2 MUX4.22@7188.19,-3687.2 ; RR1.54@6400.27,-2022.18 cw(c6410.24,-2032.15) 6410.24,-2018.05 cw(c6410.24,-2003.94) RR1.54@6400.27,-2013.92 ; P24.4@7291.47,-3146 ccw(c7229.84,-3146) 7273.42,-3102.42 ccw(c7317,-3058.84) P24.4@7317,-3120.47 ; P24.4@7298.95,-3164.05 cw(c7255.37,-3207.63) 7317,-3207.63 cw(c7378.63,-3207.63) P24.4@7335.05,-3164.05 ; P24.4@7299.47,-3146 ccw(c7257.16,-3146) 7287.08,-3116.08 ccw(c7317,-3086.16) P24.4@7317,-3128.47 ; P24.4@7304.61,-3158.39 cw(c7274.68,-3188.32) 7317,-3188.32 cw(c7359.32,-3188.32) P24.4@7329.39,-3158.39 ; 7218.79,-3687.2 ccw(c7218.79,-3694.18) 7213.85,-3689.25 cw(c7218.79,-3694.18) 7218.79,-3687.2 ; 7218.79,-3687.2 cw(c7218.79,-3680.23) 7213.85,-3685.16 ccw(c7218.79,-3680.23) 7218.79,-3687.2
CELL52: MUX4.23 P24.6 RR1.56 | length 2815.4
  Top Layer w8: RR1.56@6396.13,-2043.64 6442.96,-2043.64 6459.9,-2026.69 6625.42,-2026.69 6662,-2063.27 6662,-2532.27 7158.53,-3028.8 7158.53,-3087.53 P24.6@7217,-3146 7217,-3277 7445,-3505 7445,-3585 7420,-3610 7418.38,-3610 7415.38,-3613 7312,-3613 7263.39,-3661.61 MUX4.23@7188.19,-3661.61 ; P24.6@7191.47,-3146 ccw(c7129.84,-3146) 7173.42,-3102.42 ccw(c7217,-3058.84) P24.6@7217,-3120.47 ; P24.6@7198.95,-3164.05 cw(c7155.37,-3207.63) 7217,-3207.63 cw(c7278.63,-3207.63) P24.6@7235.05,-3164.05 ; P24.6@7199.47,-3146 ccw(c7157.16,-3146) 7187.08,-3116.08 ccw(c7217,-3086.16) P24.6@7217,-3128.47 ; P24.6@7204.61,-3158.39 cw(c7174.68,-3188.32) 7217,-3188.32 cw(c7259.32,-3188.32) P24.6@7229.39,-3158.39 ; 6410.24,-2043.64 ccw(c6410.24,-2057.74) 6400.27,-2047.77 cw(c6410.24,-2057.74) 6410.24,-2043.64 ; 6410.24,-2043.64 cw(c6410.24,-2029.53) 6400.27,-2039.51 ccw(c6410.24,-2029.53) 6410.24,-2043.64 ; 7218.79,-3661.61 ccw(c7218.79,-3668.59) 7213.85,-3663.66 cw(c7218.79,-3668.59) 7218.79,-3661.61 ; 7218.79,-3661.61 cw(c7218.79,-3654.64) 7213.85,-3659.57 ccw(c7218.79,-3654.64) 7218.79,-3661.61
CELL53: MUX4.24 P24.7 RR1.57 | length 3254.5
  Top Layer w5: v2@6294.75,-2109.83 ccw(c6279.37,-2083.19) 6309.09,-2091.15 ; v2@6295.01,-2109.7 ccw(c6290.9,-2100.14) 6300.96,-2102.83 ; v2(6296,-2112) 6296,-2102 6328.77,-2069.23 RR1.57@6370.54,-2069.23 ; v2@6297.25,-2114.17 ccw(c6287.9,-2097.97) 6305.96,-2102.81 ; 6301.51,-2100.77 ccw(c6311.04,-2103.32) v2@6302.5,-2108.25 ; 6352.82,-2069.23 ccw(c6352.82,-2051.5) 6365.35,-2064.04 cw(c6352.82,-2051.5) 6352.82,-2069.23 ; 6352.82,-2069.23 cw(c6352.82,-2086.95) 6365.35,-2074.42 ccw(c6352.82,-2086.95) 6352.82,-2069.23 ; v2@6293.5,-2112 cw(c6311.61,-2112) 6298.8,-2099.2 ccw(c6311.61,-2112) v2@6293.5,-2112 ; v2@6298.5,-2112 cw(c6328.68,-2112) 6307.34,-2090.66 ccw(c6328.68,-2112) v2@6298.5,-2112 ; v2@6303.5,-2112 cw(c6345.75,-2112) 6315.87,-2082.13 ccw(c6345.75,-2112) v2@6303.5,-2112
  Top Layer w8: P24.7@7110.87,-3043.93 ccw(c7143.29,-3054.89) 7119.09,-3079.09 ; P24.7@7117,-3046 7117,-3077 ; P24.7@7118.45,-3046.49 ccw(c7156.9,-3059.49) 7128.2,-3088.2 ; P24.7@7126.03,-3049.05 ccw(c7170.52,-3064.1) 7137.31,-3097.31 ; P24.7@7133.6,-3051.61 ccw(c7184.13,-3068.7) 7146.42,-3106.42 ; P24.7@7141.18,-3054.18 ccw(c7197.75,-3073.3) 7155.53,-3115.53 ; MUX4.24@7188.19,-3636.02 7268.98,-3636.02 7305,-3600 7410,-3600 7430.46,-3579.54 7430.46,-3511.62 7168,-3249.15 7168,-3175.62 7155.53,-3163.14 7155.53,-3115.53 7117,-3077 ; 7117,-3077 ccw(c7110.94,-3077) 7112.1,-3071.05 cw(c7110.94,-3077) 7117,-3077 ; 7117,-3077 cw(c7123.06,-3077) 7121.9,-3071.05 ccw(c7123.06,-3077) 7117,-3077 ; 7218.79,-3636.02 ccw(c7218.79,-3643) 7213.85,-3638.07 cw(c7218.79,-3643) 7218.79,-3636.02 ; 7218.79,-3636.02 cw(c7218.79,-3629.05) 7213.85,-3633.98 ccw(c7218.79,-3629.05) 7218.79,-3636.02
  Bottom Layer w5: v2(6296,-2112) 6317,-2091 6400,-2091 ; v2@6296,-2104.5 ccw(c6296,-2086.39) 6308.8,-2099.2 ccw(c6321.61,-2112) v2@6303.5,-2112
  Bottom Layer w8: 6400,-2091 6572,-2091 6597,-2116 6597,-2226 7117,-2746 P24.7@7117,-3046 ; P24.7@7098.95,-3027.95 ccw(c7055.37,-2984.37) 7117,-2984.37 ccw(c7178.63,-2984.37) P24.7@7135.05,-3027.95 ; P24.7@7104.61,-3033.61 ccw(c7074.68,-3003.68) 7117,-3003.68 ccw(c7159.32,-3003.68) P24.7@7129.39,-3033.61
CELL54: MUX4.25 P24.8 RR1.58 | length 2548.8
  Top Layer w8: RR1.58@6396.13,-2069.23 6440,-2069.23 6466.53,-2042.69 6584.95,-2042.69 6645.73,-2103.47 6645.73,-2616 7058.53,-3028.8 7058.53,-3087.53 P24.8@7117,-3146 7155,-3184 7155,-3255 7417.46,-3517.46 7417.46,-3572.23 7404.7,-3585 7295,-3585 7269.57,-3610.43 MUX4.25@7188.19,-3610.43 ; P24.8@7091.47,-3146 ccw(c7029.84,-3146) 7073.42,-3102.42 ccw(c7117,-3058.84) P24.8@7117,-3120.47 ; P24.8@7099.47,-3146 ccw(c7057.16,-3146) 7087.08,-3116.08 ccw(c7117,-3086.16) P24.8@7117,-3128.47 ; 6410.24,-2069.23 ccw(c6410.24,-2083.33) 6400.27,-2073.36 cw(c6410.24,-2083.33) 6410.24,-2069.23 ; 6410.24,-2069.23 cw(c6410.24,-2055.12) 6400.27,-2065.1 ccw(c6410.24,-2055.12) 6410.24,-2069.23 ; 7218.79,-3610.43 ccw(c7218.79,-3617.41) 7213.85,-3612.48 cw(c7218.79,-3617.41) 7218.79,-3610.43 ; 7218.79,-3610.43 cw(c7218.79,-3603.46) 7213.85,-3608.39 ccw(c7218.79,-3603.46) 7218.79,-3610.43
CELL55: MUX4.26 P24.9 RR1.59 | length 2403.4
  Top Layer w5: v2(6277,-2151) 6298.5,-2129.5 6303.25,-2129.5 6313.5,-2119.25 6313.5,-2114.5 6333.18,-2094.82 RR1.59@6370.54,-2094.82 ; v2@6277,-2143.5 ccw(c6277,-2125.39) 6289.8,-2138.2 ccw(c6302.61,-2151) v2@6284.5,-2151 ; 6352.82,-2094.82 ccw(c6352.82,-2077.09) 6365.35,-2089.63 cw(c6352.82,-2077.09) 6352.82,-2094.82 ; 6352.82,-2094.82 cw(c6352.82,-2112.55) 6365.35,-2100.01 ccw(c6352.82,-2112.55) 6352.82,-2094.82
  Top Layer w8: P24.9@7017,-3046 7017,-3072 7065,-3120 7065,-3155 7120,-3210 7120,-3545 7159.84,-3584.84 MUX4.26@7188.19,-3584.84 ; 7152.04,-3578.6 cw(c7147.77,-3594.54) MUX4.26@7162.06,-3586.29 ; 7151.57,-3576.57 ccw(c7164.57,-3563.57) 7164.57,-3581.95 cw(c7164.57,-3563.57) 7151.57,-3576.57
  Bottom Layer w5: v2(6277,-2151) 6298.5,-2129.5 6313.5,-2129.5 6324.5,-2118.5 6398.5,-2118.5 6400,-2120 ; v2@6277,-2143.5 ccw(c6277,-2125.39) 6289.8,-2138.2 ccw(c6302.61,-2151) v2@6284.5,-2151
  Bottom Layer w8: 6400,-2120 6409.35,-2120 6487.66,-2198.31 6514.31,-2198.31 7017,-2701 P24.9@7017,-3046 ; P24.9@6998.95,-3027.95 ccw(c6955.37,-2984.37) 7017,-2984.37 ccw(c7078.63,-2984.37) P24.9@7035.05,-3027.95 ; P24.9@7004.61,-3033.61 ccw(c6974.68,-3003.68) 7017,-3003.68 ccw(c7059.32,-3003.68) P24.9@7029.39,-3033.61
CELL56: MUX4.11 P24.10 RR1.60 | length 2506.2
  Top Layer w8: RR1.60@6396.13,-2094.82 6437.03,-2094.82 6473.16,-2058.69 6578.32,-2058.69 6627,-2107.37 6627,-2652.1 6975.47,-3000.57 6975.47,-3063.2 7017,-3104.73 ; MUX4.11@6961.81,-3789.57 7005.43,-3789.57 7105,-3690 7105,-3305 7017,-3217 P24.10@7017,-3146 7017,-3104.73 ; P24.10@6998.95,-3164.05 cw(c6955.37,-3207.63) 7017,-3207.63 cw(c7078.63,-3207.63) P24.10@7035.05,-3164.05 ; P24.10@7004.61,-3158.39 cw(c6974.68,-3188.32) 7017,-3188.32 cw(c7059.32,-3188.32) P24.10@7029.39,-3158.39 ; P24.10@7005.6,-3123.16 ccw(c6996.4,-3104.73) 7017,-3104.73 ; P24.10@7028.4,-3123.16 cw(c7037.6,-3104.73) 7017,-3104.73 ; 6410.24,-2094.82 ccw(c6410.24,-2108.92) 6400.27,-2098.95 cw(c6410.24,-2108.92) 6410.24,-2094.82 ; 6410.24,-2094.82 cw(c6410.24,-2080.71) 6400.27,-2090.69 ccw(c6410.24,-2080.71) 6410.24,-2094.82 ; 6992.41,-3789.57 ccw(c6992.41,-3796.54) 6987.48,-3791.61 cw(c6992.41,-3796.54) 6992.41,-3789.57 ; 6992.41,-3789.57 cw(c6992.41,-3782.59) 6987.48,-3787.52 ccw(c6992.41,-3782.59) 6992.41,-3789.57
CELL57: MUX4.10 P24.11 RR1.61 | length 2676
  Top Layer w5: v2(6307,-2149) 6307,-2146 6332.59,-2120.41 RR1.61@6370.54,-2120.41 ; v2@6307.81,-2151.37 ccw(c6303.56,-2138.88) 6316.3,-2142.29 ; 6352.82,-2120.41 ccw(c6352.82,-2102.68) 6365.35,-2115.22 cw(c6352.82,-2102.68) 6352.82,-2120.41 ; 6352.82,-2120.41 cw(c6352.82,-2138.14) 6365.35,-2125.6 ccw(c6352.82,-2138.14) 6352.82,-2120.41 ; v2@6307,-2141.5 ccw(c6307,-2130.64) 6314.68,-2138.32 cw(c6307,-2130.64) v2@6307,-2141.5 ; v2@6309.5,-2149 cw(c6322.78,-2149) 6313.39,-2139.61 ccw(c6322.78,-2149) v2@6309.5,-2149 ; v2@6314.5,-2149 cw(c6339.85,-2149) 6321.92,-2131.08 ccw(c6339.85,-2149) v2@6314.5,-2149
  Top Layer w8: P24.11@6917,-3046 6960,-3089 ; P24.11@6917.17,-3063.53 cw(c6917.56,-3104.49) 6946.52,-3075.52 cw(c6975.49,-3046.56) P24.11@6934.53,-3046.17 ; P24.11@6917.24,-3071.53 cw(c6917.81,-3131.18) 6960,-3089 ; P24.11@6942.53,-3046.24 ccw(c7002.18,-3046.81) 6960,-3089 ; MUX4.10@6961.81,-3763.98 7011.02,-3763.98 7090,-3685 7090,-3340 6960,-3210 6960,-3089 ; 6992.41,-3763.98 ccw(c6992.41,-3770.95) 6987.48,-3766.02 cw(c6992.41,-3770.95) 6992.41,-3763.98 ; 6992.41,-3763.98 cw(c6992.41,-3757) 6987.48,-3761.93 ccw(c6992.41,-3757) 6992.41,-3763.98
  Bottom Layer w5: v2(6307,-2149) 6316.5,-2139.5 6328.64,-2139.5 6339.64,-2128.5 6384.5,-2128.5 6472,-2216
  Bottom Layer w8: 6472,-2216 6492,-2236 6512,-2236 6917,-2641 P24.11@6917,-3046 ; P24.11@6898.95,-3027.95 ccw(c6855.37,-2984.37) 6917,-2984.37 ccw(c6978.63,-2984.37) P24.11@6935.05,-3027.95 ; P24.11@6904.61,-3033.61 ccw(c6874.68,-3003.68) 6917,-3003.68 ccw(c6959.32,-3003.68) P24.11@6929.39,-3033.61
CELL58: MUX4.9 P24.12 RR1.62 | length 2534
  Top Layer w8: RR1.62@6396.13,-2120.41 6434.07,-2120.41 6479.79,-2074.69 6571.26,-2074.69 6607,-2110.44 6607,-2777.27 6858.53,-3028.8 6858.53,-3087.53 P24.12@6917,-3146 6917,-3237 7070,-3390 7070,-3685 7016.61,-3738.39 MUX4.9@6961.81,-3738.39 ; P24.12@6891.47,-3146 ccw(c6829.84,-3146) 6873.42,-3102.42 ccw(c6917,-3058.84) P24.12@6917,-3120.47 ; P24.12@6898.95,-3164.05 cw(c6855.37,-3207.63) 6917,-3207.63 cw(c6978.63,-3207.63) P24.12@6935.05,-3164.05 ; P24.12@6899.47,-3146 ccw(c6857.16,-3146) 6887.08,-3116.08 ccw(c6917,-3086.16) P24.12@6917,-3128.47 ; P24.12@6904.61,-3158.39 cw(c6874.68,-3188.32) 6917,-3188.32 cw(c6959.32,-3188.32) P24.12@6929.39,-3158.39 ; 6410.24,-2120.41 ccw(c6410.24,-2134.51) 6400.27,-2124.54 cw(c6410.24,-2134.51) 6410.24,-2120.41 ; 6410.24,-2120.41 cw(c6410.24,-2106.3) 6400.27,-2116.28 ccw(c6410.24,-2106.3) 6410.24,-2120.41 ; 6992.41,-3738.39 ccw(c6992.41,-3745.36) 6987.48,-3740.43 cw(c6992.41,-3745.36) 6992.41,-3738.39 ; 6992.41,-3738.39 cw(c6992.41,-3731.41) 6987.48,-3736.34 ccw(c6992.41,-3731.41) 6992.41,-3738.39
CELL59: MUX4.8 P24.13 RR1.63 | length 3063.9
  Top Layer w5: v2(6347,-2146) RR1.63@6370.54,-2146 ; RR1.63@6363.79,-2148.88 ccw(c6356.3,-2152.06) 6358.41,-2144.21 ccw(c6359.84,-2138.87) RR1.63@6364.43,-2141.93 ; RR1.63@6363.79,-2143.12 cw(c6356.3,-2139.94) 6358.41,-2147.79 cw(c6359.84,-2153.13) RR1.63@6364.43,-2150.07 ; v2@6352.82,-2146 ccw(c6352.82,-2128.27) 6365.35,-2140.81 cw(c6352.82,-2128.27) v2@6352.82,-2146 ; v2@6352.82,-2146 cw(c6352.82,-2163.73) 6365.35,-2151.19 ccw(c6352.82,-2163.73) v2@6352.82,-2146 ; v2@6353.36,-2149.98 cw(c6357.8,-2152.77) 6359.16,-2147.7 ; v2@6353.36,-2149.98 cw(c6357.8,-2152.77) 6359.16,-2147.7 ; v2@6353.36,-2149.98 cw(c6357.8,-2152.77) 6359.16,-2147.7 ; v2@6353.36,-2142.02 ccw(c6357.8,-2139.23) 6359.16,-2144.3 ; v2@6353.36,-2142.02 ccw(c6357.8,-2139.23) 6359.16,-2144.3 ; v2@6353.36,-2142.02 ccw(c6357.8,-2139.23) 6359.16,-2144.3 ; v2@6353.92,-2148.88 cw(c6361.2,-2151.92) 6359.16,-2144.3 ; v2@6353.92,-2148.88 cw(c6361.2,-2151.92) 6359.16,-2144.3 ; v2@6353.92,-2148.88 cw(c6361.2,-2151.92) 6359.16,-2144.3 ; v2@6353.92,-2143.12 ccw(c6361.2,-2140.08) 6359.16,-2147.7 ; v2@6353.92,-2143.12 ccw(c6361.2,-2140.08) 6359.16,-2147.7 ; v2@6353.92,-2143.12 ccw(c6361.2,-2140.08) 6359.16,-2147.7 ; RR1.63@6365.11,-2146 ccw(c6365.11,-2164.11) 6352.3,-2151.3 cw(c6365.11,-2164.11) RR1.63@6365.11,-2146 ; RR1.63@6365.11,-2146 cw(c6365.11,-2127.89) 6352.3,-2140.7 ccw(c6365.11,-2127.89) RR1.63@6365.11,-2146
  Top Layer w8: P24.13@6817,-3046 6817,-3077 ; P24.13@6821.75,-3041.6 cw(c6792.37,-3068.81) 6832.33,-3071.38 ; P24.13@6827.87,-3036.44 cw(c6790.88,-3068.96) 6840.03,-3072.12 ; MUX4.8@6961.81,-3712.8 7022.2,-3712.8 7056,-3679 7056,-3511.62 7055,-3510.62 7055,-3440 6855.53,-3240.53 6855.53,-3115.53 6817,-3077 ; 6817,-3077 ccw(c6810.94,-3077) 6812.1,-3071.05 cw(c6810.94,-3077) 6817,-3077 ; 6817,-3077 cw(c6823.06,-3077) 6821.9,-3071.05 ccw(c6823.06,-3077) 6817,-3077 ; 6992.41,-3712.8 ccw(c6992.41,-3719.77) 6987.48,-3714.84 cw(c6992.41,-3719.77) 6992.41,-3712.8 ; 6992.41,-3712.8 cw(c6992.41,-3705.82) 6987.48,-3710.75 ccw(c6992.41,-3705.82) 6992.41,-3712.8 ; P24.13@6810.87,-3043.93 ccw(c6843.29,-3054.89) 6819.09,-3079.09 cw(c6843.29,-3054.89) P24.13@6810.87,-3043.93 ; P24.13@6818.45,-3046.49 ccw(c6856.9,-3059.49) 6828.2,-3088.2 cw(c6856.9,-3059.49) P24.13@6818.45,-3046.49 ; P24.13@6826.03,-3049.05 ccw(c6870.52,-3064.1) 6837.31,-3097.31 cw(c6870.52,-3064.1) P24.13@6826.03,-3049.05 ; P24.13@6833.6,-3051.61 ccw(c6884.13,-3068.7) 6846.42,-3106.42 cw(c6884.13,-3068.7) P24.13@6833.6,-3051.61 ; P24.13@6841.18,-3054.18 ccw(c6897.75,-3073.3) 6855.53,-3115.53 cw(c6897.75,-3073.3) P24.13@6841.18,-3054.18
  Bottom Layer w5: v2(6347,-2146) 6362,-2146 ; 6411,-2195 6362,-2146 ; 6362,-2146 ccw(c6362,-2157.25) 6353,-2150.5 cw(c6362,-2157.25) 6362,-2146 ; 6362,-2146 cw(c6362,-2134.75) 6353,-2141.5 ccw(c6362,-2134.75) 6362,-2146
  Bottom Layer w8: 6411,-2195 6490.01,-2274.01 6490.2,-2273.81 6521.61,-2273.81 6538.99,-2291.19 6538.99,-2291.47 6817,-2569.48 P24.13@6817,-3046 ; P24.13@6798.95,-3027.95 ccw(c6755.37,-2984.37) 6817,-2984.37 ccw(c6878.63,-2984.37) P24.13@6835.05,-3027.95 ; P24.13@6804.61,-3033.61 ccw(c6774.68,-3003.68) 6817,-3003.68 ccw(c6859.32,-3003.68) P24.13@6829.39,-3033.61
CELL60: MUX4.7 P24.14 RR1.64 | length 2329.4
  Top Layer w8: RR1.64@6396.13,-2146 6431.11,-2146 6486.41,-2090.69 6564.63,-2090.69 6591,-2117.06 6591,-2783.9 6775.47,-2968.37 6775.47,-3063.2 6817,-3104.73 ; P24.14@6798.95,-3164.05 cw(c6755.37,-3207.63) 6817,-3207.63 cw(c6878.63,-3207.63) P24.14@6835.05,-3164.05 ; P24.14@6804.61,-3158.39 cw(c6774.68,-3188.32) 6817,-3188.32 cw(c6859.32,-3188.32) P24.14@6829.39,-3158.39 ; P24.14@6805.6,-3123.16 ccw(c6796.4,-3104.73) 6817,-3104.73 ; P24.14@6828.4,-3123.16 cw(c6837.6,-3104.73) 6817,-3104.73 ; MUX4.7@6961.81,-3687.2 7020.8,-3687.2 7043,-3665 7043,-3518 6817,-3292 P24.14@6817,-3146 6817,-3104.73 ; 6410.24,-2146 ccw(c6410.24,-2160.1) 6400.27,-2150.13 cw(c6410.24,-2160.1) 6410.24,-2146 ; 6410.24,-2146 cw(c6410.24,-2131.9) 6400.27,-2141.87 ccw(c6410.24,-2131.9) 6410.24,-2146 ; 6992.41,-3687.2 ccw(c6992.41,-3694.18) 6987.48,-3689.25 cw(c6992.41,-3694.18) 6992.41,-3687.2 ; 6992.41,-3687.2 cw(c6992.41,-3680.23) 6987.48,-3685.16 ccw(c6992.41,-3680.23) 6992.41,-3687.2
CELL61: MUX4.6 P24.15 RR1.65 | length 2591.7
  Top Layer w5: v2(6327,-2169) 6329.59,-2171.59 RR1.65@6370.54,-2171.59 ; 6352.82,-2171.59 ccw(c6352.82,-2153.86) 6365.35,-2166.4 cw(c6352.82,-2153.86) 6352.82,-2171.59 ; 6352.82,-2171.59 cw(c6352.82,-2189.32) 6365.35,-2176.78 ccw(c6352.82,-2189.32) 6352.82,-2171.59 ; v2@6328.77,-2167.23 ccw(c6339.29,-2156.71) 6339.29,-2171.59 cw(c6339.29,-2156.71) v2@6328.77,-2167.23 ; v2@6332.3,-2174.3 cw(c6338.85,-2180.85) 6338.85,-2171.59 ccw(c6338.85,-2180.85) v2@6332.3,-2174.3 ; v2@6332.3,-2163.7 ccw(c6351.36,-2144.64) 6351.36,-2171.59 cw(c6351.36,-2144.64) v2@6332.3,-2163.7
  Top Layer w8: P24.15@6717,-3071.53 cw(c6717,-3133.16) 6760.58,-3089.58 cw(c6804.16,-3046) P24.15@6742.53,-3046 ; P24.15@6717,-3063.53 cw(c6717,-3105.84) 6746.92,-3075.92 cw(c6776.84,-3046) P24.15@6734.53,-3046 ; P24.15@6717,-3046 6765,-3094 6765,-3315 6826.62,-3376.62 6869.24,-3376.62 7028,-3535.37 7028,-3647 7013.39,-3661.61 MUX4.6@6961.81,-3661.61 ; 6992.41,-3661.61 ccw(c6992.41,-3668.59) 6987.48,-3663.66 cw(c6992.41,-3668.59) 6992.41,-3661.61 ; 6992.41,-3661.61 cw(c6992.41,-3654.64) 6987.48,-3659.57 ccw(c6992.41,-3654.64) 6992.41,-3661.61
  Bottom Layer w5: v2@6328.77,-2170.76 cw(c6336.22,-2178.16) 6341.53,-2169.1 ; v2@6331.6,-2174.92 cw(c6336.76,-2181.57) 6340.97,-2174.28 ; v2@6332,-2176 6362,-2176 ; v2@6332.32,-2174.29 cw(c6340.94,-2182.85) 6347.09,-2172.37 ; v2@6334.24,-2167.06 ccw(c6343.77,-2164.51) 6338.84,-2173.05 ; 6421,-2235 6362,-2176 ; 6362,-2176 cw(c6362,-2134.01) 6332.3,-2163.7 ccw(c6362,-2134.01) 6362,-2176 ; v2@6325.23,-2170.77 ccw(c6337.86,-2158.14) 6337.86,-2176 cw(c6337.86,-2158.14) v2@6325.23,-2170.77 ; v2@6328.77,-2167.23 ccw(c6349.93,-2146.08) 6349.93,-2176 cw(c6349.93,-2146.08) v2@6328.77,-2167.23
  Bottom Layer w8: 6421,-2235 6479.75,-2293.75 ; 6479.65,-2293.85 6479.65,-2463.65 6717,-2701 P24.15@6717,-3046 ; P24.15@6698.95,-3027.95 ccw(c6655.37,-2984.37) 6717,-2984.37 ccw(c6778.63,-2984.37) P24.15@6735.05,-3027.95 ; P24.15@6704.61,-3033.61 ccw(c6674.68,-3003.68) 6717,-3003.68 ccw(c6759.32,-3003.68) P24.15@6729.39,-3033.61
CELL62: MUX4.5 P24.16 RR1.66 | length 2124.5
  Top Layer w8: RR1.66@6396.13,-2171.59 6456.7,-2171.59 6575,-2289.89 6575,-2790.53 6675.47,-2891 6675.47,-3063.2 6717,-3104.73 ; P24.16@6698.95,-3164.05 cw(c6655.37,-3207.63) 6717,-3207.63 cw(c6778.63,-3207.63) P24.16@6735.05,-3164.05 ; P24.16@6704.61,-3158.39 cw(c6674.68,-3188.32) 6717,-3188.32 cw(c6759.32,-3188.32) P24.16@6729.39,-3158.39 ; P24.16@6705.6,-3123.16 ccw(c6696.4,-3104.73) 6717,-3104.73 ; P24.16@6728.4,-3123.16 cw(c6737.6,-3104.73) 6717,-3104.73 ; MUX4.5@6961.81,-3636.02 7003.98,-3636.02 7015,-3625 7015,-3540.76 6992.01,-3517.77 6912.77,-3517.77 6717,-3322 P24.16@6717,-3146 6717,-3104.73 ; 6410.24,-2171.59 ccw(c6410.24,-2185.7) 6400.27,-2175.72 cw(c6410.24,-2185.7) 6410.24,-2171.59 ; 6410.24,-2171.59 cw(c6410.24,-2157.49) 6400.27,-2167.46 ccw(c6410.24,-2157.49) 6410.24,-2171.59 ; 6992.41,-3636.02 ccw(c6992.41,-3643) 6987.48,-3638.07 cw(c6992.41,-3643) 6992.41,-3636.02 ; 6992.41,-3636.02 cw(c6992.41,-3629.05) 6987.48,-3633.98 ccw(c6992.41,-3629.05) 6992.41,-3636.02
CELL63: MUX4.4 P24.17 RR1.67 | length 2504.4
  Top Layer w5: v2@6299,-2182.5 ccw(c6313.95,-2171.27) 6311.32,-2189.78 ; v2(6301,-2181) 6305,-2181 6318,-2194 ; RR1.67@6370.54,-2197.18 6367.36,-2194 6318,-2194 ; 6318,-2194 ccw(c6304.25,-2207.75) 6301.9,-2188.45 cw(c6304.25,-2207.75) 6318,-2194 ; v2@6301.3,-2183.48 cw(c6302.68,-2194.8) 6310.74,-2186.74 ccw(c6302.68,-2194.8) v2@6301.3,-2183.48 ; v2@6308.5,-2181 ccw(c6316.95,-2181) 6310.97,-2186.97 cw(c6316.95,-2181) v2@6308.5,-2181 ; 6345.14,-2194 cw(c6345.14,-2222.59) 6365.35,-2202.37 ccw(c6345.14,-2222.59) 6345.14,-2194 ; 6357.21,-2194 cw(c6357.21,-2210.52) 6368.89,-2198.84 ccw(c6357.21,-2210.52) 6357.21,-2194 ; 6360.5,-2194 ccw(c6360.5,-2187.13) 6365.35,-2191.99 cw(c6360.5,-2187.13) 6360.5,-2194
  Top Layer w8: P24.17@6617,-3071.53 cw(c6617,-3133.16) 6660.58,-3089.58 cw(c6704.16,-3046) P24.17@6642.53,-3046 ; P24.17@6617,-3063.53 cw(c6617,-3105.84) 6646.92,-3075.92 cw(c6676.84,-3046) P24.17@6634.53,-3046 ; P24.17@6617,-3046 6675,-3104 6675,-3550 6735.43,-3610.43 MUX4.4@6961.81,-3610.43 ; 6931.21,-3610.43 ccw(c6931.21,-3603.46) 6936.15,-3608.39 cw(c6931.21,-3603.46) 6931.21,-3610.43 ; 6931.21,-3610.43 cw(c6931.21,-3617.41) 6936.15,-3612.48 ccw(c6931.21,-3617.41) 6931.21,-3610.43
  Bottom Layer w5: v2(6301,-2181) 6313,-2193 ; 6410,-2244 6359,-2193 6313,-2193 ; 6313,-2193 ccw(c6302.08,-2203.92) 6301.35,-2188.49 cw(c6302.08,-2203.92) 6313,-2193 ; 6313,-2193 cw(c6323.92,-2182.08) 6308.49,-2181.35 ccw(c6323.92,-2182.08) 6313,-2193
  Bottom Layer w8: 6410,-2244 6457,-2291 6457,-2516 6617,-2676 P24.17@6617,-3046 ; P24.17@6598.95,-3027.95 ccw(c6555.37,-2984.37) 6617,-2984.37 ccw(c6678.63,-2984.37) P24.17@6635.05,-3027.95 ; P24.17@6604.61,-3033.61 ccw(c6574.68,-3003.68) 6617,-3003.68 ccw(c6659.32,-3003.68) P24.17@6629.39,-3033.61